# Altium PCB 9981_pro_main_board_PCB.pcbdoc
Units mil, origin at the board's own origin, x right, y up, seen from the top; angles counter-clockwise.
Board outline 4534 x 3830 mil, 2 copper layers (Top Layer, Bottom Layer); 70 components, 80 nets, 321 pads, 260 vias.
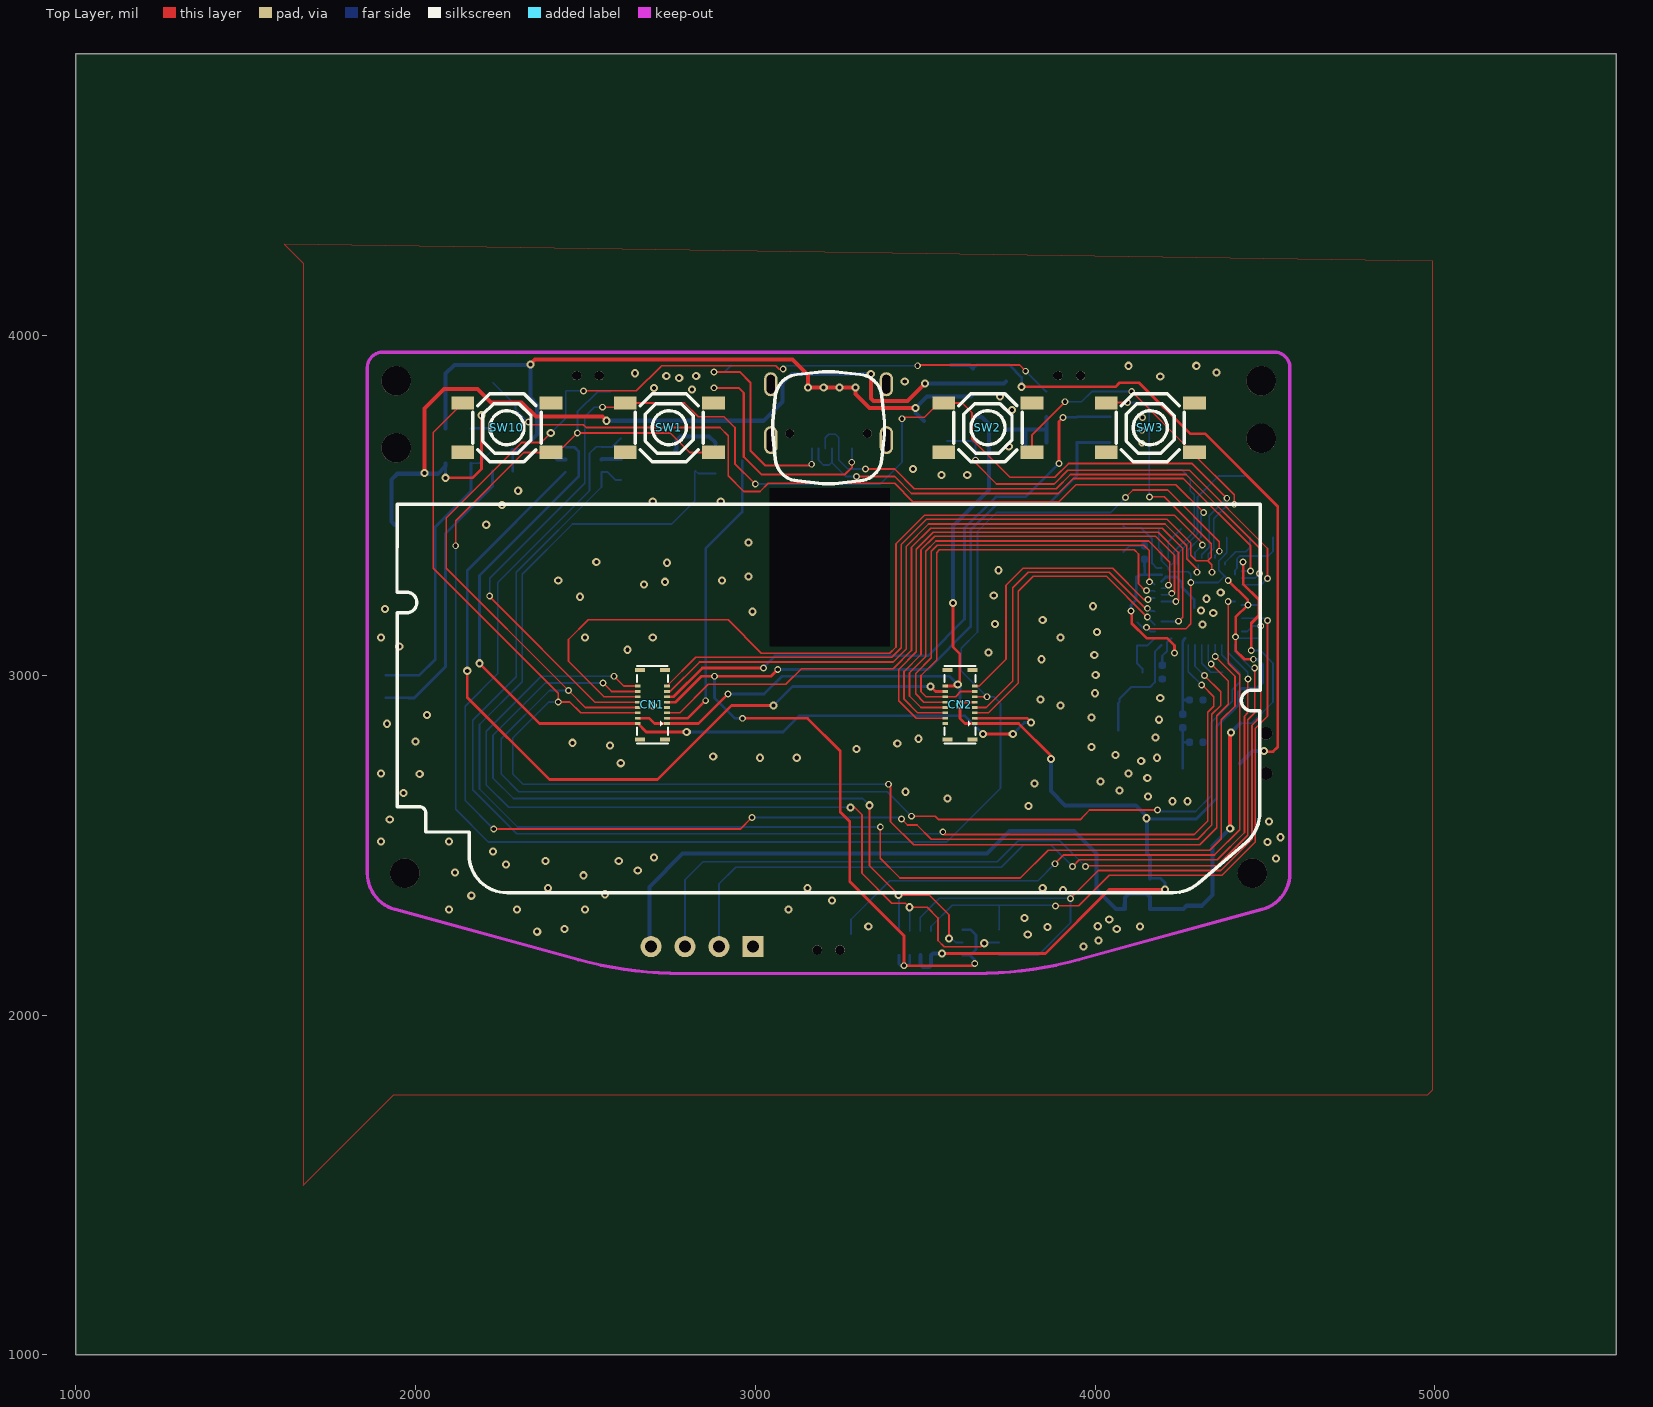
[diagram p0: Top Layer view]
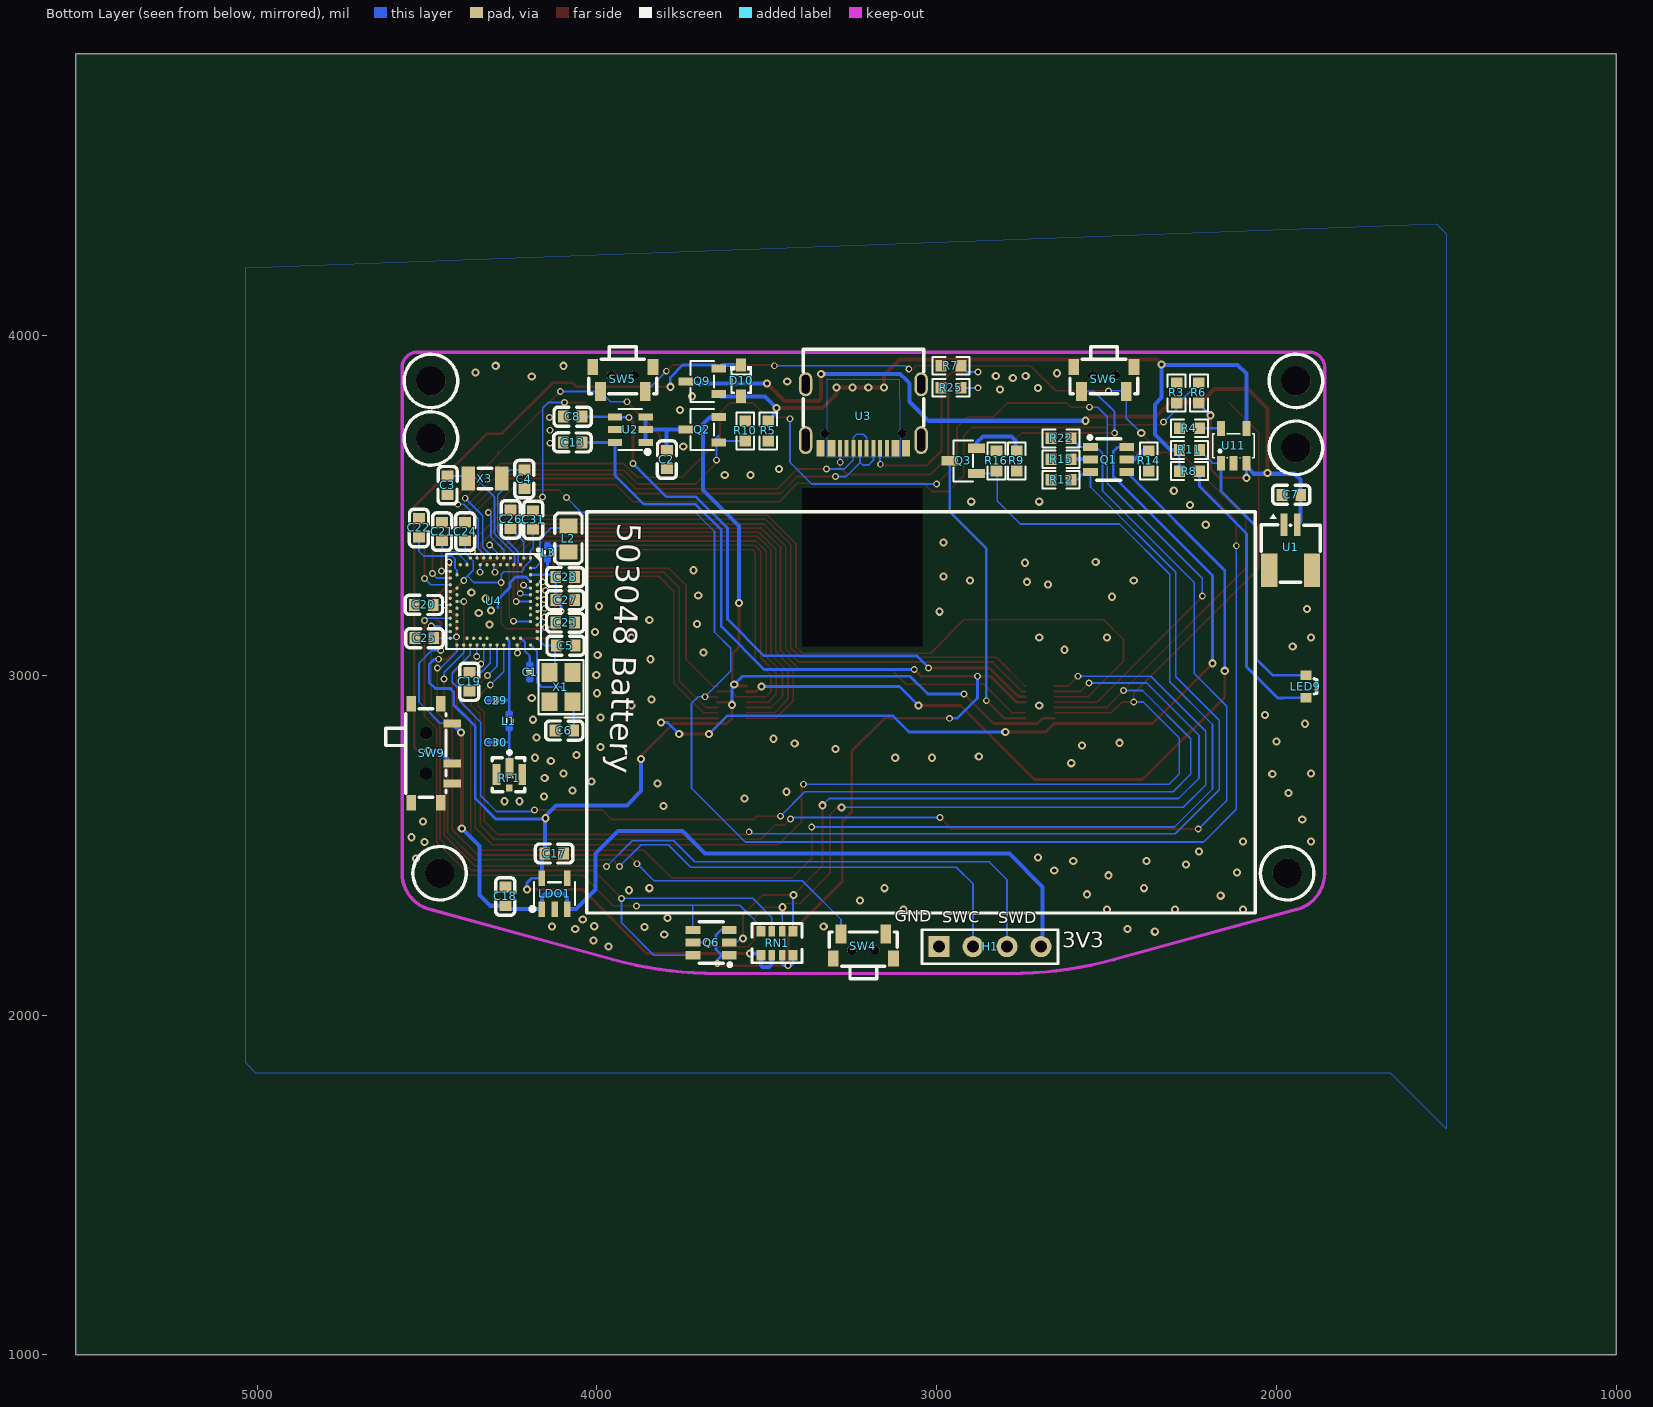
[diagram p1: Bottom Layer view, seen from below]

## Layer stack, top to bottom
Top Layer: signal copper (thickness not stored)
Dielectric: dielectric 12.6, FR-4, Dk 4.8
Bottom Layer: signal copper (thickness not stored)

## Board outline
5534,1000 1000,1000 1000,4830 5534,4830
cut-out: 3042,3552 3042,3086 3396,3086 3396,3552

## Components (designator, comment, footprint, x,y, rotation, side; value= is the part's Value field where it differs from the comment)
C1 "100nF" 0402电容- 4196,3010 r180 bottom
C2 "10uF" C0603 3794,3636 r270 bottom
C3 "20pF" C0603 4440,3560 r90 bottom
C4 "20pF" C0603 4214,3578 r90 bottom
C5 "12pF" C0603 4092,3088 r0 bottom
C6 "12pF" C0603 4096,2838 r0 bottom
C7 "10uF" C0603 1956,3532 r0 bottom
C8 "10uF" C0603 4072,3762 r180 bottom
C13 "10uF" C0603 4072,3686 r0 bottom
C17 "10uF" C0603 4126,2476 r0 bottom
C18 "10uF" C0603 4270,2350 r270 bottom
C19 "820pF" C0603 4376,2982 r270 bottom
C20 "4.7uF" C0603 4510,3208 r180 bottom
C21 "4.7uF" C0603 4456,3424 r270 bottom
C22 "4.7uF" C0603 4524,3434.61 r270 bottom
C23 "100nF" C0603 4094,3156 r180 bottom
C24 "100nF" C0603 4388,3424 r270 bottom
C25 "1uF" C0603 4508,3110 r180 bottom
C26 "100nF" C0603 4254,3460 r270 bottom
C27 "1uF" C0603 4093.39,3222 r0 bottom
C28 "47nF" C0603 4094,3290 r180 bottom
C29 "1pF" 0402电容- 4298,2926 r270 bottom
C30 "1pF" 0402电容- 4298,2802 r270 bottom
C31 "100nF" C0603 4188,3458 r90 bottom
CN1 "BM20B(0.8)-16DS-0.4V(51)" CONN-SMD_BM20B-0.8-16DS-0.4V-51 2697.13,2913.93 r90 top
CN2 "BM20B(0.8)-16DS-0.4V(51)" CONN-SMD_BM20B-0.8-16DS-0.4V-51 3602.64,2913.93 r90 top
D10 "BAT60B" SOD-323_L1.8-W1.3-LS2.5-RD 3576,3868 r90 bottom
H1 "HDR-F-2.54_1x4" HDR-F-2.54_1X4 2843,2202 r0 bottom
L1 "3.9nH" 0402电阻 4260,2866 r0 bottom
L2 "10uH" L0805 4084,3402 r90 bottom
L3 "15nH" 0402电阻 4144,3362 r180 bottom
LDO1 "ME6211C33M5G-N" SOT-23-5_L3.0-W1.7-P0.95-LS2.8-BL 4124.91,2358 r0 bottom
LED9 "TJ-S1706SW6TGLC2R-A5" LED-SMD_L1.7-W1.1-RD_RED-SIDE 1913,2967.75 r90 bottom
Q1 "NDC7002N_C404322" SOT-23-6_L2.9-W1.6-P0.95-LS2.8-BR 2494,3636 r180 bottom
Q2 "AO3401_C727156" SOT-23-3_L2.9-W1.6-P1.90-LS2.8-BR 3690,3724 r0 bottom
Q3 "AO3400A_C347475" SOT-23-3_L2.9-W1.3-P1.90-LS2.4-BR 2922,3632 r0 bottom
Q6 "NDC7002N_C404322" SOT-23-6_L2.9-W1.6-P0.95-LS2.8-BR 3664,2214 r0 bottom
Q9 "AO3401_C727156" SOT-23-3_L2.9-W1.6-P1.90-LS2.8-BR 3690,3866 r0 bottom
R3 "2MΩ" R0603 2294,3832 r90 bottom
R4 "5.1kΩ" R0603 2256,3728 r180 bottom
R5 "10kΩ" R0603 3496,3720 r90 bottom
R6 "820kΩ" R0603 2228,3832 r90 bottom
R7 "5.1kΩ" R0603 2958,3912 r0 bottom
R8 "1kΩ" R0603 2256,3602 r0 bottom
R9 "10Ω" R0603 2764,3632 r90 bottom
R10 "2MΩ" R0603 3564,3720 r270 bottom
R11 "10kΩ" R0603 2256,3664 r0 bottom
R12 "10kΩ" R0603 2634,3576 r180 bottom
R14 "10Ω" R0603 2376,3632 r270 bottom
R15 "10Ω" R0603 2634,3637 r180 bottom
R16 "10kΩ" R0603 2824.02,3632 r270 bottom
R22 "10kΩ" R0603 2634,3698 r0 bottom
R25 "5.1kΩ" R0603 2958,3847 r0 bottom
RF1 "BWIPX-4-001E" IPEX-SMD_BWIPX-4-001E 4258,2698 r180 bottom
RN1 "10kΩ" RES-ARRAY-SMD_0603-8P-L3.2-W1.6-BL 3470,2212 r0 bottom
SW1 "TS-1187A-B-A-B" SW-SMD_4P-L5.1-W5.1-P3.70-LS6.5-TL-2 2746.74,3729.64 r0 top
SW2 "TS-1187A-B-A-B" SW-SMD_4P-L5.1-W5.1-P3.70-LS6.5-TL-2 3684.89,3729.64 r0 top
SW3 "TS-1187A-B-A-B" SW-SMD_4P-L5.1-W5.1-P3.70-LS6.5-TL-2 4162.68,3729.64 r0 top
SW4 "GT-TC018A-H0375-L1" SW-SMD_L4.7-W3.5-P3.35-EH 3215.83,2202.97 r180 bottom
SW5 "GT-TC018A-H0375-L1" SW-SMD_L4.7-W3.5-P3.35-EH 3924.02,3872 r0 bottom
SW6 "GT-TC018A-H0375-L1" SW-SMD_L4.7-W3.5-P3.35-EH 2507.61,3872 r0 bottom
SW9 "MSK12CO2-BDM" SW-SMD_MSK12CO2-BDM 4486.7,2770.9 r90 bottom
SW10 "TS-1187A-B-A-B" SW-SMD_4P-L5.1-W5.1-P3.70-LS6.5-TL-2 2268.94,3729.64 r0 top
U1 "WAFER-SH1.0-2PWB" CONN-SMD_2P-P1.00_XUNPU_WAFER-SH1.0-2PWB 1958,3377 r0 bottom
U2 "VRD1828MTX" SOT-23-6_L2.9-W1.6-P0.95-LS2.8-BL 3902,3724 r270 bottom
U3 "GT-USB-7010ASV" USB-C-SMD_G-SWITCH_GT-USB-7010ASV 3215.83,3763.03 r180 bottom
U4 "NRF52840_dzt" NRF52840_DZT 4304,3222 r90 bottom
U11 "TP4054" SOT-23-5_L3.0-W1.7-P0.95-LS2.8-BR 2126,3676 r90 bottom
X1 "32MHz" CRYSTAL-SMD_4P-L3.2-W2.5-BL 4106,2966 r270 bottom
X3 "32.768kHz" FC-135R_L3.2-W1.5 4330,3579.9 r0 bottom

## Footprints (in the part's own frame and the unit in brackets; to place one, negate y for a bottom-side part, rotate by r counter-clockwise, add the part's x,y. Pads: shape width x height; smd on the part's side, far side on the other; paste and mask are expansions set on the pad)
0402电容- [mil]
  Top Layer region: 8,15 6.53,11.46 3,10 -7,10 -10.54,11.46 -12,15 -12,25 -10.54,28.53 -7,30 3,30 6.53,28.53 8,25
  Top Layer region: 8,-25 6.53,-28.54 3,-30 -7,-30 -10.54,-28.54 -12,-25 -12,-15 -10.54,-11.47 -7,-10 3,-10 6.53,-11.47 8,-15
  silkscreen extent -11,-7 7,7
0402电阻 [mil]
  Top Layer region: -12,-15 -10.53,-11.46 -7,-10 3,-10 6.54,-11.46 8,-15 8,-25 6.54,-28.53 3,-30 -7,-30 -10.53,-28.53 -12,-25
  Top Layer region: -12,25 -10.53,28.54 -7,30 3,30 6.54,28.54 8,25 8,15 6.54,11.47 3,10 -7,10 -10.53,11.47 -12,15
  silkscreen extent -12,-6 8,6
C0603 [mm]
  rect 0.8x0.9 smd paste+0 mask+0.051: 1(0.7,0) 2(-0.7,0)
  silkscreen extent -1.39,-0.72 1.41,0.71
CONN-SMD_2P-P1.00_XUNPU_WAFER-SH1.0-2PWB [mm]
  rect 0.5x1.7 smd paste+0 mask+0.05: 1(0.5,-1.7) 2(-0.5,-1.7)
  rect 1.2x2.5 smd paste+0 mask+0.05: 3(-1.6,1.7) 4(1.6,1.7)
  silkscreen extent -2.2,-2.54 2.2,2.6
CONN-SMD_BM20B-0.8-16DS-0.4V-51 [mm]
  rect 0.2x0.42 smd paste+0 mask+0.051: 1(-1.4,-1.09) 2(-1.4,1.09) 3(-1,-1.09) 4(-1,1.09) 5(-0.6,-1.09) 6(-0.6,1.09) 7(-0.2,-1.09) 8(-0.2,1.09) 9(0.2,-1.09) 10(0.2,1.09) 11(0.6,-1.09) 12(0.6,1.09) 13(1,-1.09) 14(1,1.09) 15(1.4,-1.09) 16(1.4,1.09)
  rect 0.3x0.75 smd paste+0 mask+0.051: 17(2.61,0.925) 18(2.61,-0.925) 19(-2.61,-0.925) 20(-2.61,0.925)
  silkscreen extent -2.91,-1.16 2.9,1.16
CRYSTAL-SMD_4P-L3.2-W2.5-BL [mm]
  rect 1.4x1.2 smd paste+0 mask+0.051: 1(1.1,0.85) 2(-1.1,0.85) 3(-1.1,-0.85) 4(1.1,-0.85)
  silkscreen extent -2.03,-1.68 2.26,1.91
FC-135R_L3.2-W1.5 [mm]
  rect 1x1.8 smd paste+0 mask+0.051: 1(1.25,0) 2(-1.25,0)
  silkscreen extent -0.51,-0.76 0.51,0.76
HDR-F-2.54_1X4 [mil]
  rect 62x62 hole 35 paste+0 mask+2: 1(150,0)
  round 62 hole 35 paste+0 mask+2: 2(50,0) 3(-50,0) 4(-150,0)
  silkscreen extent -200,-50 200,50
IPEX-SMD_BWIPX-4-001E [mm]
  rect 0.6x1.5 smd paste+0 mask+0.051: 1(0,0.738)
  rect 0.58x1.58 smd paste+0 mask+0.051: 2(-0.96,0.263) 3(0.96,0.263)
  rect 0.5x0.5 smd paste+0 mask+0.051: 4(0,-0.737)
  silkscreen extent -1.27,-1.01 1.14,2.05
L0805 [mil]
  rect 44.59x54.21 smd paste-3937.01 mask+2: 1(38.05,0) 2(-38.04,0)
  silkscreen extent -73,-40 77,40
LED-SMD_L1.7-W1.1-RD_RED-SIDE [mm]
  rect 0.7x0.8 smd paste+0 mask+0.051: 1(0.847,0) 2(-0.847,0)
  silkscreen extent -0.56,-0.8 0.57,-0.63
NRF52840_DZT [mm]
  round 0.25 smd paste-100 mask+0.051: A8(1.148,-3.25) A10(0.648,-3.25) A12(0.148,-3.25) A14(-0.352,-3.25) A16(-0.852,-3.25) A18(-1.352,-3.25) A20(-1.852,-3.25) A22(-2.352,-3.25) A23(-2.852,-3.25) AA24(-3.352,2.25) AB2(2.648,2.5) AC5(1.898,2.75) AC9(0.898,2.75) AC11(0.398,2.75) AC13(-0.102,2.75) AC15(-0.602,2.75) AC17(-1.102,2.75) AC19(-1.602,2.75) AC21(-2.102,2.75) AC24(-3.352,2.75) AD2(2.648,3.25) AD4(2.148,3.25) AD6(1.648,3.25) AD8(1.148,3.25) AD10(0.648,3.25) AD12(0.148,3.25) AD14(-0.352,3.25) AD16(-0.852,3.25) AD18(-1.352,3.25) AD20(-1.852,3.25) AD22(-2.352,3.25) AD23(-2.852,3.25) B1(3.148,-2.75) B3(2.398,-2.75) B5(1.898,-2.75) B7(1.398,-2.75) B9(0.898,-2.75) B11(0.398,-2.75) B13(-0.102,-2.75) B15(-0.602,-2.75) B17(-1.102,-2.75) B19(-1.602,-2.75) B24(-3.352,-2.75) C1(3.148,-2.25) D2(2.648,-2) D23(-2.852,-2) E24(-3.352,-1.75) F2(2.648,-1.5) F23(-2.852,-1.5) G1(3.148,-1.25) H2(2.648,-1) H23(-2.852,-1) J1(3.148,-0.75) J24(-3.352,-0.75) K2(2.648,-0.5) L1(3.148,-0.25) L24(-3.352,-0.25) M2(2.648,0) N1(3.148,0.25) N24(-3.352,0.25) P2(2.648,0.5) P23(-2.852,0.5) R1(3.148,0.75) R24(-3.352,0.75) T2(2.648,1) T23(-2.852,1) U1(3.148,1.25) U24(-3.352,1.25) V23(-2.852,1.5) W1(3.148,1.75) W24(-3.352,1.75) Y2(2.648,2) Y23(-2.852,2)
  silkscreen extent -3.65,-3.55 3.85,3.55
R0603 [mil]
  rect 31.75x34.02 smd paste-3937.01 mask+2: 1(29.66,0) 2(-29.66,0)
  silkscreen extent -55,-26 55,26
RES-ARRAY-SMD_0603-8P-L3.2-W1.6-BL [mm]
  rect 0.65x0.8 smd paste+0 mask+0.051: 1(1.2,0.9) 4(-1.2,0.9) 5(-1.2,-0.9) 8(1.2,-0.9)
  rect 0.5x0.8 smd paste+0 mask+0.051: 2(0.4,0.9) 3(-0.4,0.9) 6(-0.4,-0.9) 7(0.4,-0.9)
  silkscreen extent -1.87,-1.47 1.87,1.45
SOD-323_L1.8-W1.3-LS2.5-RD [mm]
  rect 1x0.75 smd paste+0 mask+0.051: 1(1.173,0) 2(-1.173,0)
  silkscreen extent -0.9,-0.8 1.08,0.8
SOT-23-3_L2.9-W1.3-P1.90-LS2.4-BR [mm]
  rect 1.25x0.7 smd paste+0 mask+0.051: 1(-1,0.95) 2(-1,-0.95) 3(1,0)
  silkscreen extent -0.73,-1.53 0.73,1.53
SOT-23-3_L2.9-W1.6-P1.90-LS2.8-BR [mm]
  rect 1.07x0.6 smd paste+0 mask+0.051: 1(-1.235,0.95) 2(-1.235,-0.95) 3(1.235,0)
  silkscreen extent -0.88,-1.54 0.88,1.54
SOT-23-5_L3.0-W1.7-P0.95-LS2.8-BL [mm]
  rect 0.49x1.157 smd paste+0 mask+0.051: 1(0.95,1.154) 2(0,1.154) 3(-0.95,1.154)
  rect 0.49x1.175 smd paste+0 mask+0.051: 4(-0.95,-1.154) 5(0.95,-1.154)
  silkscreen extent -1.53,-0.85 1.8,1.29
SOT-23-5_L3.0-W1.7-P0.95-LS2.8-BR [mm]
  rect 1.1x0.6 smd paste+0 mask+0.051: 1(-1.3,0.95) 2(-1.3,0) 3(-1.3,-0.95) 4(1.3,-0.95) 5(1.3,0.95)
  silkscreen extent -0.9,-1.55 0.9,1.55
SOT-23-6_L2.9-W1.6-P0.95-LS2.8-BL [mm]
  rect 0.532x1.072 smd paste+0 mask+0.051: 1(0.95,1.149) 2(0,1.149) 3(-0.95,1.149) 4(-0.95,-1.149) 5(0,-1.149) 6(0.95,-1.149)
  silkscreen extent -1.54,-0.89 1.82,1.45
SOT-23-6_L2.9-W1.6-P0.95-LS2.8-BR [mm]
  rect 1.1x0.6 smd paste+0 mask+0.051: 1(-1.35,0.95) 2(-1.35,0) 3(-1.35,-0.95) 4(1.35,-0.95) 5(1.35,0) 6(1.35,0.95)
  silkscreen extent -1.52,-1.55 0.9,1.78
SW-SMD_4P-L5.1-W5.1-P3.70-LS6.5-TL-2 [mm]
  rect 1.7x1 smd paste+0 mask+0.051: 1(-3.3,1.85) 2(3.3,1.85) 3(-3.3,-1.85) 4(3.3,-1.85)
  silkscreen extent -2.55,-2.55 2.55,2.55
SW-SMD_L4.7-W3.5-P3.35-EH [mm]
  rect 0.8x1.4 smd paste+0 mask+0.051: 1(1.675,0.918) 2(-1.675,0.918)
  rect 0.8x1.2 smd paste+0 mask+0.051: 3(2.25,-0.917) 4(-2.25,-0.917)
  round 0.7 hole 0.7 unplated paste+0: ""(-0.85,-0.282) ""(0.85,-0.282)
  silkscreen extent -2.54,-2.43 2.54,1.07
SW-SMD_MSK12CO2-BDM [mm]
  rect 0.6x1.3 smd paste+0 mask+0.051: 1(-2.25,-1.525) 2(-0.75,-1.525) 3(2.25,-1.525)
  rect 1.15x0.7 smd paste+0 mask+0.051: 4(-3.7,1.525) 4(-3.7,-0.675) 4(3.7,-0.675) 4(3.7,1.525)
  round 0.95 hole 0.95 unplated paste+0: ""(-1.5,0.425) ""(1.5,0.425)
  silkscreen extent -3.27,-1.08 3.33,3.42
USB-C-SMD_G-SWITCH_GT-USB-7010ASV [mm]
  oval 1x2.1 hole 0.6 slot 1.7 at 90 deg paste+0 mask+0.05: 1(4.32,-1.78) 2(-4.32,-1.78)
  oval 1x1.8 hole 0.6 slot 1.4 at 90 deg paste+0 mask+0.05: 3(-4.32,2.4) 4(4.32,2.4)
  rect 0.6x1.24 smd paste-100 mask+0.05: A1B12(3.2,-2.4) A4B9(2.4,-2.4) B1A12(-3.2,-2.4) B4A9(-2.4,-2.4)
  rect 0.3x1.24 smd paste-100 mask+0.05: A5(1.25,-2.4) A6(0.25,-2.4) A7(-0.25,-2.4) A8(-1.25,-2.4) B5(-1.75,-2.4) B6(-0.75,-2.4) B7(0.75,-2.4) B8(1.75,-2.4)
  round 0.65 hole 0.65 unplated paste+0: ""(-2.89,-1.28) ""(2.9,-1.28)
  silkscreen extent -4.5,-0.69 4.5,5.03

## Free pads (board coordinates)
  round 86.61 hole 86.61 unplated paste+0: ""(1942.65,3670.5) ""(1942.65,3867.35) ""(1968.24,2417.99) ""(4463.39,2417.98) ""(4488.98,3698.06) ""(4488.98,3867.35)

## Via types
v1: diameter 24, hole 12, Top Layer to Bottom Layer, tented both sides, 165 vias
v2: diameter 20, hole 12, Top Layer to Bottom Layer, tented both sides, 92 vias
v3: diameter 24.41, hole 12.2, Top Layer to Bottom Layer, tented both sides, 3 vias

## Nets (pads, with @x,y where several pads share a name; then routed paths per layer and width w, separated by ;. In a path a pad name is that pad's centre, name@x,y a point inside that pad or via, vN(x,y) a via of type N, cw(c..) or ccw(c..) an arc to the next point about the centre after c; other vN are vias at no path point)
1V8: C13.2 CN1.9 Q6.1 Q6.3 RN1.3 RN1.4 U2.6 | length 3817.9
  Top Layer w8: CN1.9 2765.8,2921.8 2842,2998 v2(2880,2998) 3046,2998 v2(3066,3018) ; v2(2962,2874) 3154,2874 3250,2778 3250,2598 3278,2570 3278,2394 3438,2234 ; 3286,2386 3438,2234 ; v2(3646,2152) 3640,2146 v2(3438,2146) ; v2(3438,2146) 3438,2234 ; v2(3438,2146) 3438,2234
  Bottom Layer w8: v2(2880,2998) 2880,2934 2940,2874 v2(2962,2874) ; v2(3066,3018) 3508,3018 3634,3144 3634,3428 3710,3504 3862,3504 3947.24,3589.24 U2.6 ; RN1.4 3422.8,2151.2 3428,2146 v2(3438,2146) 3450,2146 3454.3,2150.2 RN1.3 ; Q6.1@3610.9,2176.6 3632.6,2176.6 ; Q6.3@3610.9,2251.4 3634.6,2251.4 3650,2236 3650,2194 3632.6,2176.6 ; v2(3646,2152) 3646,2163.2 3632.6,2176.6 ; U2.6 3947.8,3686 C13.2
2V8: C8.1 CN1.11 U2.4 | length 1876.5
  Top Layer w8: CN1.11 2759.6,2937.6 2844,3022 v2(3024,3022) ; v2(3894,3624) 3894,3748 v2(3906,3760)
  Bottom Layer w8: v2(3024,3022) 3024,3024 3058,3058 3508,3058 3616,3166 3616,3434 3708,3526 3796,3526 v2(3894,3624) ; v2(3906,3760) 3945.84,3760 U2.4 ; U2.4 C8.1
AI2: R3.2 R6.1 U4.J1 | length 2544.2
  Top Layer w5: v2(2332,3746) 2340,3738 2494,3738 2502,3730 2896,3730 2920,3706 2920,3588 2966,3542 3014,3542 3038,3566 3410,3566 3464,3512 3894,3512 3944,3562 4238,3562 v2(4320,3480)
  Bottom Layer w5: R6.1 2287.32,3802.34 R3.2 2294,3784 v2(2332,3746) ; U4.J1 4274.47,3370.47 4312,3408 4312,3472 v2(4320,3480)
AI3: U4.K2
CN2_2: CN2.2
COL0: CN1.10 SW1.1 SW2.1 U4.N1 | length 4457.9
  Top Layer w5: v2(2218,3234) 2218,3232 2528.19,2921.81 CN1.10 ; v2(2550,3790) 2604.3,3790 SW1.1 2791.52,3802.48 2832,3762 2908,3762 2940,3730 2940,3624 v2(3000,3564) ; v2(3432,3756) 3436,3760 3498,3760 3540.5,3802.5 SW2.1 ; SW2.1 3609.52,3802.48 3638,3774 3638,3696 3750,3584 3882,3584 3922,3624 4286,3624 v2(4388,3522)
  Bottom Layer w5: v2(2218,3234) 2218,3274 ; v2(2550,3790) 2526,3790 2498,3762 ; v2(3000,3564) 3368,3564 3432,3628 v2(3432,3756) ; U4.N1 4313.84,3355.84 4336,3378 4336,3470 v2(4388,3522) ; 2218,3274 2218,3286 ; 2218,3274 2218,3286 ; 2218,3286 2498,3566 ; 2218,3286 2498,3566 ; 2498,3566 2498,3762 ; 2498,3566 2498,3762
COL1: CN1.8 SW5.2 SW6.2 U4.W24 | length 6599.5
  Top Layer w5: 2090,3444 2090,3316 ; v3(2398,3714) 2370,3686 2312,3686 2090,3464 2090,3316 ; v2(2494,3838) 2650,3838 2720,3908 2724,3912 3060,3912 3070,3902 v2(3082,3902) ; CN1.8 2499.9,2906.1 v2(2450,2956) ; v2(3460,2586) 3530,2586 3540,2576 3956.24,2576 3984,2604 v2(4184,2604) ; v2(3478,3912) 3480,3914 3778,3914 v2(3796,3896) ; 2090,3316 v2(2450,2956) ; 2090,3316 v2(2450,2956)
  Bottom Layer w5: v3(2398,3714) 2441.66,3757.66 SW6.2 ; SW6.2 2443.8,3838 v2(2494,3838) ; v2(2450,2956) 2394,2956 2252,2814 2252,2710 2304,2658 3388,2658 v2(3460,2586) ; v2(3082,3902) 3092,3912 v2(3478,3912) ; v2(3796,3896) 3856.1,3835.9 SW5.2 ; v2(4184,2604) 4188,2600 4296,2600 4342,2646 4342,2650 4342,2862 4404,2924 4404,2958 4414,2968 4426,2980 4426,3008 4372.9,3061.1 U4.W24@4372.9,3090.05
COL2: CN1.6 SW10.1 U4.R24 | length 4555.1
  Top Layer w5: SW10.1 2052,3715.5 2052,3316 2420,2948 v2(2420,2922) 2454,2922 2485.69,2890.31 CN1.6 ; v2(3392,2680) 3398,2674 3398,2570 3466,2502 4308,2502 4358,2552 4358,2882 4392,2916 ; 4392,2916 4392,2984 ; 4392,2916 4392,2984 ; 4392,2984 v2(4342,3034) 4392,2984
  Bottom Layer w5: v2(2420,2922) 2392,2922 2286,2816 2286,2710 2316,2680 v2(3392,2680) ; U4.R24@4333.53,3090.05 4333.53,3042.47 v2(4342,3034)
COL3: CN1.15 SW3.1 U4.T2 | length 2796.3
  Top Layer w5: CN1.15@2740,2969.1 2824.9,3054 3402,3054 3430,3082 3430,3386 3504,3460 4212,3460 4282,3390 4282,3354 4298,3338 4332,3338 ; SW3.1 4034.3,3804 v2(4096,3804) ; v2(4160,3526) 4204,3526 4342,3388 4342,3348 4332,3338 ; v2(4344,3304) 4344,3326 4332,3338
  Bottom Layer w5: v2(4096,3804) 4144,3804 4160,3788 v2(4160,3526) ; U4.T2 4344,3325.64 v2(4344,3304)
COL4: CN1.5 U4.B19 | length 2215.8
  Top Layer w5: CN1.5 2778.3,2890.3 2862,2974 3090,2974 3136,3020 3406,3020 3460,3074 3460,3378 3516,3434 4198,3434 4258,3374 4258,3172 v2(4246,3160)
  Bottom Layer w5: U4.B19 4244.94,3158.94 v2(4246,3160)
COL5: CN2.12 CN2.13 U4.A10 | length 1346.7
  Top Layer w5: CN2.13@3645.5,2953.3 3605.3,2953.3 3589.6,2937.6 CN2.12 3502.4,2937.6 3488,2952 3488,3000 3534,3046 3534,3362 3542,3370 4116,3370 4128,3358 4128,3270 4148,3250 v2(4152,3250)
  Bottom Layer w5: v2(4152,3250) 4173.58,3250 U4.A10@4176.05,3247.53
COL6: CN2.10 U4.A8 | length 1304.6
  Top Layer w5: CN2.10 3496.2,2921.8 3472,2946 3472,3006 3518,3052 3518,3366 3536,3384 4144,3384 4160,3368 v2(4160,3276)
  Bottom Layer w5: v2(4160,3276) 4167.26,3276 U4.A8@4176.05,3267.21
COL7: CN2.8 U4.B9 | length 1417.6
  Top Layer w5: CN2.8 3487.9,2906.1 3454,2940 3454,3008 3502,3056 3502,3366 3532,3396 4158,3396 4220,3334 4220,3266 v2(4216,3266)
  Bottom Layer w5: U4.B9 4207.37,3257.37 v2(4216,3266)
COL8: CN2.6 U4.B11 | length 1536.7
  Top Layer w5: CN2.6 3477.7,2890.3 3438,2930 3438,3012 3488,3062 3488,3370 3528,3410 4178,3410 4234,3354 4234,3242 v2(4226,3242)
  Bottom Layer w5: U4.B11 4221.68,3237.68 v2(4226,3242)
COL9: CN2.4 U4.B13 | length 1638.4
  Top Layer w5: CN2.4 3473.4,2874.6 3422,2926 3422,3018 3474,3070 3474,3372 3524,3422 4186,3422 4246,3362 4246,3220 4238,3220 v2(4238,3218)
  Bottom Layer w5: U4.B13 v2(4238,3218)
DCC: L2.1 U4.B3 | length 205.1
  Bottom Layer w6: L2.1 4090,3434 4136,3434 4168,3402 4168,3330 4181.6,3316.4 U4.B3
DCCH: U4.AB2
DEC2: U4.A18
DEC6: C27.1 C28.2 U4.B5 U4.E24 | length 461
  Top Layer w8: v2(4106,3190) 4108,3188 4108,3154 4152,3110 4212,3110 4234,3088 v2(4234,3066)
  Bottom Layer w6: v2(4234,3066) 4234,3089 U4.E24
  Bottom Layer w8: v2(4106,3190) 4106,3207.1 C27.1 C28.2 ; C28.2@4125.6,3290 4132.3,3296.7 U4.B5 ; 4146,3342 4146.3,3296.7
DECUSB: C22.1 U4.AC5 | length 205.8
  Bottom Layer w5: U4.AC5 4412.27,3310.27 4418,3316 4418,3344 4426,3352 4510,3352 4524,3366 C22.1
EXT_VCC: C2.2 Q2.3 U2.1 U2.2 U2.3 | length 254.1
  Bottom Layer w12: Q2.3 U2.2 ; C2.2 3795.6,3665.2 3795.6,3724 ; U2.1 U2.3
EXTERN_5V: D10.2 Q9.1 R5.1 R8.1 R11.1 U3.A4B9 U3.B4A9 U11.4 | length 2255.7
  Top Layer w12: v1(2338,3916) 2352,3930 3110,3930 3154.7,3885.3 v1(3154.67,3848) ; v1(3154.67,3848) v1(3294.67,3848) 3294.67,3829.33 3336,3788 v1(3472,3788)
  Bottom Layer w8: R8.1 R11.1
  Bottom Layer w12: U11.4 2088.6,3888.6 2114,3914 2336,3914 v1(2338,3916) 2338,3818 2358,3798 2358,3710 2312,3664 R11.1 ; R5.1 3472,3773.7 v1(3472,3788) 3505.8,3821.8 D10.2 3634.6,3821.8 Q9.1
  other v1: 3201.34,3848 3248,3848
GND: C2.1 C3.2 C4.2 C5.2 C6.1 C7.1 C8.2 C13.1 C17.2 C18.2 C19.1 C20.2 C21.2 C22.2 C23.1 C24.2 C25.2 C26.2 C27.2 C28.1 C31.1 CN1.7 CN1.17 CN1.18 CN1.19 CN1.20 CN2.17 CN2.18 CN2.19 CN2.20 H1.1 LDO1.2 R3.1 R4.2 R5.2 R7.1 R9.2 R10.2 R12.2 R14.1 R15.2 R16.2 R22.1 R25.1 RF1.2 RF1.3 RF1.4 SW4.1 U1.1 U1.3 U1.4 U2.5 U3.1 U3.2 U3.3 U3.4 U3.A1B12 U3.B1A12 U4.B7 U4.F23 U11.2 X1.2 X1.4 | length 161.2
  Bottom Layer w8: U4.B7 4208.68,3290 4240,3290 4256,3274 4256,3260 4292,3224 4292,3200
  other v1: 3966,2202 4010,2220 3802,2238 2358,2246 2438,2254 4064,2254 3860,2260 3332.7,2261.08 4132.7,2261.08 4008,2262 4042,2282 3792,2286 2098.2,2311.8 2298.2,2311.8 2498.2,2311.8 3098.2,2311.8 3226,2338 2164,2352 2558,2356 3906,2368 2390,2374 3154,2374 3846,2374 2494,2412 2116,2420 2654,2426 2266,2444 2382,2454 2598,2454 4532.7,2461.08 2702,2464 2228,2482 4508,2510 1898.2,2511.8 2098.2,2511.8 4546,2524 4512,2570 1924,2576 3804,2616 4228,2630 4272,2630 3566,2638 4156,2644 1964,2654 3442,2658 4072,2662 3822,2682 4016,2688 4154,2698 2012,2710 1898.2,2711.8 4098.2,2711.8 2604,2742 4136,2748 3014,2758 3122,2758 4182,2758 2876,2762 4060,2766 3298,2784 3990,2790 2572,2794 3418,2800 2462,2802 2000,2806 3480,2814 4178,2818 1916,2858 4188,2870 3990,2876 2034,2884 2698.2,2911.8 3898.2,2911.8 3840,2930 4192,2934 4000,2948 4002,3002 3842,3048 3998,3060 3686,3068 2624,3076 1952,3086 1898.2,3111.8 2498.2,3111.8 2698.2,3111.8 3898.2,3111.8 4006,3128 4316,3150 3706,3152 3846,3164 4348,3184 2992,3188 4312,3192 1910,3196 3994,3204 4328,3226 2484,3232 3702,3236 4370,3244 2672,3268 2734,3276 2420,3280 2902,3280 2980,3292 3716,3310 2740,3332 2532,3334 2980,3392 2208,3444 2254,3502 2698.2,3511.8 2898.2,3511.8 2302,3544 3548,3590 3624,3590 3464,3608 3746.11,3673.99 3756,3782 3720,3822 2814,3842 2702,3846 3440,3866 2776,3876 4192,3880 2738,3882 2826,3882 2646,3890 4358,3892 4098.2,3911.8 4298.2,3911.8
  other v2: 4138,3684 4138,3722 4140,3760
KEYB2: CN2.11 SW1.4 SW6.1 SW10.4 U4.U1 | length 5384
  Top Layer w5: v2(2118,3382) 2118,3456 2318.8,3656.8 SW10.4 ; SW10.4 2418.8,3656.8 v2(2476,3714) 2750,3714 2807.2,3656.8 SW1.4 ; CN2.11@3645.5,2937.6 v2(3682,2937.56) ; v2(4090,3524) 4112,3546 4214,3546 4366,3394 v2(4366,3366)
  Bottom Layer w5: v2(2118,3382) 2118,2606 2214,2510 3564,2510 3722,2668 3722,2918 3702.4,2937.6 v2(3682,2937.56) 3606,3013.6 3606,3080 3654,3128 3654,3424 3710,3480 4046,3480 v2(4090,3524) ; U4.U1 4353.21,3353.21 v2(4366,3366)
  Bottom Layer w6: v2(2476,3714) 2476,3776 2535.9,3835.9 SW6.1@2573.5,3835.9
L1_1: RF1.1 | length 139
  Bottom Layer w7.99: RF1.1 4258,2846 ; 4258,2804 4278,2804
L3_1: L2.2 | length 69.5
  Bottom Layer w6: L2.2 4102,3382 4128,3382 4146,3382
LEDA_D: CN1.2 CN2.3 Q1.6 | length 2725.4
  Top Layer w8: v1(2188,3036) 2365.2,2858.8 CN1.2 2679.04,2834 v1(2798,2834) ; CN2.3@3645.5,2874.6 3799.4,2874.6 v1(3812,2862) ; v1(3670,2828) v1(3758,2828)
  Bottom Layer w8: v1(2188,3036) 2188,3294 2480,3586 2480,3660 2468,3672 2442.3,3672 Q1.6 ; v1(2798,2834) 3082,2834 3130,2882 3616,2882 v1(3670,2828) ; v1(3758,2828) 3792,2862 v1(3812,2862)
LEDB_+: C17.1 C20.1 C23.2 C24.1 C25.1 C31.2 CN1.1 CN1.4 CN2.1 CN2.9 CN2.16 LDO1.5 Q2.2 RN1.1 RN1.2 U4.A22 U4.AD14 U4.AD23 U4.B1 U4.W1 | length 5898
  Top Layer w5: v2(4152,3142) 4156,3138 4268,3138 4282,3152 v2(4282,3274)
  Top Layer w8: CN1.4 2687.4,2874.6 2703.2,2858.8 CN1.1 ; CN1.1 2832.82,2858.82 v2(2920,2946) ; v1(3550,2182) 3854,2182 4042,2370 v1(4206,2370) ; CN2.16@3559.7,2969.1 3591.1,2969.1 v1(3596,2974) 3602,2980 3602,3064 3582,3084 v1(3582,3214) ; CN2.9@3645.5,2921.8 3610.5,2921.8 v1(3602.64,2913.93) 3602.6,2873.4 3617.2,2858.8 3645.5,2858.8 3775.2,2858.8 3870,2764 v1(3870,2754) ; v2(4392,3280) 4450,3222 v2(4450,3208) 4414,3172 v2(4414,3114) 4414,3074 4440,3048 v2(4466,3048)
  Bottom Layer w5: C31.2 4188,3375.46 4195.73,3367.73 U4.B1 4195.73,3338.27 4215.86,3318.14 4215.86,3312.14 4222,3306 4274,3306 4282,3298 v2(4282,3274) 4362.32,3274 4381.16,3292.84 ; C24.1@4388,3407.05 4388,3361.05 U4.W1 4364,3337.05 4364,3310 4392,3282 v2(4392,3280) ; v2(4414,3114) 4418,3110 C25.1
  Bottom Layer w6: C23.2@4125.6,3156 4139.6,3142 v2(4152,3142) 4164.58,3129.42 U4.A22@4176.05,3129.42 ; U4.AD14 4432.2,3208 v2(4450,3208) C20.1
  Bottom Layer w8: v2(2920,2946) 3026,2946 3078,2998 3572,2998 v1(3596,2974) 3602.64,2967.36 v1(3602.64,2913.93) ; v1(4152,2580) 4154,2578 4298,2578 4358,2638 4358,2850 4422,2914 4422,2952 4432,2962 4476,2962 4494,2980 4494,3032 4478,3048 v2(4466,3048) ; LDO1.5 4192.6,2403.4 4206,2390 v1(4206,2370)
  Bottom Layer w12: RN1.2@3485.7,2176.6 3485.7,2150.2 3494,2142 3512,2142 3517.2,2147.2 RN1.1 3522.7,2182 v1(3550,2182) ; v1(3582,3214) 3582,3440 3688,3546 3688,3644 3688,3740 3666.6,3761.4 Q2.2 ; v1(3870,2754) 3870,2660 3912,2618 4120,2618 4153.6,2584.4 C17.1 4162.3,2467.2 LDO1.5
LEDB_D: CN1.3 Q3.3 | length 885.8
  Top Layer w8: CN1.3 2801.4,2874.6 2852.8,2926 v2(2854,2926)
  Bottom Layer w8: v2(2854,2926) 2854,3374 2961.37,3481.37 Q3.3
P0.09: Q1.1 R22.2 U4.L24 | length 5336
  Top Layer w5: v2(2230,2548) 2956,2548 v2(2990,2582) ; v2(3430,2578) 3448,2560 3476,2560 3518,2518 4302,2518 4344,2560 4344,2886 4370,2912 4370,2952 v2(4322,3000)
  Bottom Layer w5: 2146,2660 2146,2910 ; v2(2230,2548) 2146,2632 2146,2910 ; v2(2990,2582) 3426,2582 v2(3430,2578) ; U4.L24@4294.16,3090.05 4294.16,3027.84 v2(4322,3000) ; 2146,2910 2242,3006 ; 2146,2910 2242,3006 ; 2242,3006 2242,3274 ; 2242,3006 2242,3274 ; 2242,3274 2512,3544 ; 2242,3274 2512,3544 ; 2512,3544 2512,3654 ; 2512,3544 2512,3654 ; 2512,3654 Q1.1@2531.4,3673.4 ; 2512,3654 Q1.1@2531.4,3673.4 ; Q1.1@2531.4,3673.4 Q1.1 Q1.1@2531.4,3673.4
  Bottom Layer w6: Q1.1@2547.1,3673.4 2579.7,3673.4 R22.2
P0.10: Q1.3 R12.1 U4.J24 | length 3961.1
  Top Layer w5: v2(3552,2540) 3552,2532 4292,2532 4332,2572 4332,2892 4350,2910 4350,2938 4316,2972 v2(4314,2972)
  Bottom Layer w5: Q1.3 2547.2,3555.2 2296,3304 2296,2996 2168,2868 2168,2664 2298,2534 3546,2534 v2(3552,2540) ; U4.J24@4274.47,3090.05 4274.47,3011.53 v2(4314,2972)
  Bottom Layer w6: Q1.3@2547.1,3598.6 2565.4,3598.6 2588,3576 R12.1
P0.13: Q2.1 R10.1 U4.AD8 | length 1353.2
  Top Layer w5: v2(3648,3634) 3648,3626 3710,3564 3880,3564 3920,3604 4278,3604 4508,3374 v2(4508,3286)
  Bottom Layer w5: Q2.1 3641.4,3707.4 3648,3700.8 v2(3648,3634) ; U4.AD8 4489.21,3267.21 v2(4508,3286)
  Bottom Layer w6: R10.1 3637.6,3690.3 Q2.1
P0.15: U4.AD10
P0.17: U4.AD12
P0.20: U4.AD16
P0.22: Q6.4 RN1.8 U4.AD18 | length 1892.1
  Top Layer w5: v2(3884,2322) 3952,2322 4042,2412 4374,2412 4472,2510 4472,2844 4508,2880 v2(4508,3162)
  Bottom Layer w5: RN1.8 3517.2,2261.2 3580,2324 3882,2324 v2(3884,2322) ; Q6.4 3718.3,2252.6 3718.3,2324 ; U4.AD18 4501.21,3168.79 v2(4508,3162)
P0.24: U4.AD20
P0.26: U4.G1
P1.00: Q6.6 RN1.7 U4.AD22 | length 2136
  Top Layer w5: v2(3928,2344) 4010,2426 4370,2426 4462,2518 4462,2854 4488,2880 v2(4488,3146)
  Bottom Layer w5: RN1.7 3485.7,2287.7 3542,2344 v2(3928,2344) 3928,2272 3832.6,2176.6 Q6.6 ; U4.AD22 4447.42,3129.42 4464,3146 v2(4488,3146)
P1.04: Q3.1 R16.1 U4.U24 | length 4438
  Top Layer w5: v2(3368,2554) 3368,2462 3426,2404 3780,2404 3862,2486 4338,2486 4372,2520 4372,2870 4412,2910 4412,2998 v2(4354,3056)
  Bottom Layer w5: Q3.1 2831.8,3594.6 R16.1 2822,3600.3 2822,3514 2754,3446 2462,3446 2314,3298 2314,2982 2188,2856 2188,2666 2300,2554 v2(3368,2554) ; U4.U24@4353.21,3090.05 4354,3089.26 v2(4354,3056)
P1.09: SW2.4 SW3.4 SW5.1 U4.R1 | length 1058.3
  Top Layer w5: SW2.4 3814.8,3708.8 v2(3912,3806) ; v2(4108,3836) 4287.2,3656.8 SW3.4 4292.6,3649.4 4410,3532 v2(4410,3504)
  Bottom Layer w5: v2(3912,3806) 3960.08,3806 SW5.1 ; SW5.1 v2(4108,3836) ; U4.R1 4333.5,3357.5 4350,3374 4350,3462 4392,3504 v2(4410,3504)
R4_1: R4.1 U11.5 | length 62.9
  Bottom Layer w8: U11.5 R4.1
R7_2: R7.2 U3.A5 | length 625.6
  Top Layer w6: v2(2878,3894) 2954,3894 2986,3862 2986,3662 3030,3618 3162,3618 v2(3166,3622)
  Bottom Layer w6: v2(2878,3894) 2910.3,3894 R7.2 ; v2(3166,3622) 3166.6,3622.6 U3.A5
R8_2: LED9.2 R8.2 | length 846.5
  Bottom Layer w8: LED9.2 1979.6,2934.4 1980,2934 1996,2934 2088,3026 2088,3418 2226.3,3556.4 R8.2
R9_1: Q3.2 R9.1 | length 175.2
  Bottom Layer w12: R9.1 2768,3665.7 2768,3692 2780,3704 2864,3704 2882.6,3685.4 Q3.2
R11_2: LED9.1 R11.2 U11.1 | length 864.1
  Bottom Layer w5: U11.1 2187.15,3624.81 R11.2
  Bottom Layer w8: LED9.1 2011.08,3001.08 2058,3048 2058,3438 2163.4,3543.4 U11.1
R14_2: Q1.5 R14.2 | length 75.4
  Bottom Layer w12: R14.2 2392.3,3661.7 2418,3636 Q1.5
R15_1: Q1.2 R15.1 | length 57.6
  Bottom Layer w12: Q1.2@2547.1,3636 2548.1,3637 R15.1
R25_2: R25.2 U3.B5 | length 736.8
  Top Layer w6: v2(2878,3847) 2951,3847 2966,3832 2966,3644 3018,3592 3264,3592 3284,3612 v2(3284,3628)
  Bottom Layer w6: v2(2878,3847) R25.2 ; v2(3284,3628) U3.B5
RESET: SW4.2 U4.AC13 | length 2002.7
  Top Layer w5: v2(3882,2446) 3908,2472 4352,2472 4426,2546 4426,3002 4392,3036 v2(4392,3218)
  Bottom Layer w5: SW4.2 3281.8,2281.8 3396,2396 3832,2396 v2(3882,2446) ; v2(4392,3218) U4.AC13
ROW0: CN2.5 U4.A20 | length 914.8
  Top Layer w5: CN2.5@3645.5,2890.3 3686.3,2890.3 3774,2978 3774,3248 3818,3292 4034,3292 v2(4154,3172)
  Bottom Layer w5: v2(4154,3172) 4154,3171.15 U4.A20@4176.05,3149.1
ROW1: CN1.12 U4.L1 | length 2675.4
  Top Layer w5: CN1.12 2554.4,2937.6 2450,3042 2450,3106 2508,3164 2920,3164 3018,3066 3396,3066 3414,3084 3414,3388 3498,3472 4234,3472 4316,3390 v2(4316,3384)
  Bottom Layer w5: U4.L1 4294.16,3362.16 v2(4316,3384)
ROW2: CN1.13 U4.M2 | length 2051.9
  Top Layer w5: CN1.13 2749.3,2953.3 2836,3040 3406,3040 3444,3078 3444,3380 3510,3446 4206,3446 4270,3382 4270,3344 4300,3314 v2(4300,3304)
  Bottom Layer w5: v2(4300,3304) 4304,3308 U4.M2
ROW3: CN2.7 U4.A16 | length 903.7
  Top Layer w5: CN2.7@3645.5,2906.1 3680.1,2906.1 3758,2984 3758,3258 3804,3304 4042,3304 4148,3198 v2(4154,3198)
  Bottom Layer w5: v2(4154,3198) 4156,3198 4164,3190 4174.52,3190 U4.A16@4176.05,3188.47
S$8205: 
S$8209: 
S$8213: 
S$8217: 
S$48758: 
S$52734: 
SWC: H1.2 U4.AA24 | length 2427.5
  Top Layer w5: v2(3934,2438) 3954,2458 4360,2458 4440,2538 4440,2880 4450,2890 v2(4450,2990)
  Bottom Layer w5: H1.2 2893,2387 2942,2436 3724,2436 3790,2502 3870,2502 v2(3934,2438) ; U4.AA24@4392.58,3090.05 4392.58,3067.42 4450,3010 v2(4450,2990)
SWD: H1.3 U4.AC24 | length 2579.5
  Top Layer w5: v2(3972,2438) 3974,2440 4360,2440 4450,2530 4450,2870 4470,2890 v2(4470,3022)
  Bottom Layer w5: H1.3 2793,2399 2846,2452 3712,2452 3774,2514 3896,2514 v2(3972,2438) ; U4.AC24 4412.27,3069.73 4468,3014 4468,3020 v2(4470,3022)
TP_MOTION2_1V8: CN2.15 U4.A12 | length 842.9
  Top Layer w5: CN2.15@3645.5,2969.1 3659,2969.1 3738,3048 3738,3266 3788,3316 4052,3316 4144,3224 v2(4156,3224)
  Bottom Layer w5: v2(4156,3224) 4156,3226 4158,3228 4175.89,3228 U4.A12@4176.05,3227.84
TP_SCL_1V8: CN1.16 Q6.5 RN1.6 | length 2604.7
  Top Layer w5: v2(2584,2998) 2613,2969.1 CN1.16@2654.2,2969.1 ; v1(3280,2612) 3292.01,2612 3314,2590.01 3314,2418 3402,2330 3442,2330 v1(3454,2318) 3506,2318 3538,2286 3538,2220 3556,2202 3664,2202 v1(3674,2212)
  Bottom Layer w5: v2(2584,2998) 2370,2998 2208,2836 2208,2678 2274,2612 v1(3280,2612) ; v1(3454,2318) 3454.3,2317.7 RN1.6@3454.3,2247.4 ; v1(3674,2212) 3676,2214 Q6.5
TP_SDA_1V8: CN1.14 Q6.2 RN1.5 | length 2461.8
  Top Layer w5: v2(2552,2978) 2576.7,2953.3 CN1.14 ; v1(3336,2618) 3336,2440 v1(3422,2354) 3512,2354 3570,2296 v1(3570,2226)
  Bottom Layer w5: v2(2552,2978) 2382,2978 2228,2824 2228,2698 2288,2638 3316,2638 v1(3336,2618) ; v1(3422,2354) 3422.8,2353.2 RN1.5 ; v1(3570,2226) 3578,2226 3590,2214 Q6.2@3610.9,2214
TPBLK_LEDK2: CN2.14 Q1.4 | length 2409.7
  Top Layer w8: v1(2152,3014) 2152,2936 2394,2694 2712,2694 2930,2912 v1(3054,2912) ; v1(3516,2968) 3530.7,2953.3 CN2.14
  Bottom Layer w8: v1(2152,3014) 2152,3309.8 Q1.4 ; v1(3054,2912) 3110,2968 v1(3516,2968)
U4_C1: C26.1 U4.C1 | length 102.5
  Bottom Layer w5: U4.C1 4215.42,3393.86 C26.1
U4_D23: U4.D23 | length 91.9
  Bottom Layer w6: 4198,3030 4198,3058 4212,3072 4212,3098 4223.7,3109.7 U4.D23
U4_H23: U4.H23 | length 237.5
  Bottom Layer w7.99: 4258,2928 4278,2928
  Bottom Layer w8: 4258,2894 4258,3093.7 cw(c4280.64,3093.72) U4.H23
U4_N24: C19.2 U4.N24 | length 126.9
  Bottom Layer w5: U4.N24@4313.8,3090 4314,3036 4340.4,3009.6 C19.2
USB_D+: U3.A6 U3.B6 U4.AD6 | length 1658.9
  Top Layer w5: v2(3324,3608) 3410,3608 3468,3550 3886,3550 3928,3592 4268,3592 4484,3376 v2(4484,3300)
  Bottom Layer w5: U3.A6 3206,3700 3216,3710 3236,3710 3245.4,3700.6 U3.B6 3245.4,3634.6 3272,3608 v2(3324,3608) ; U4.AD6 4470.9,3286.9 v2(4484,3300)
USB_D-: U3.A7 U3.B7 U4.AD4 | length 1596.9
  Top Layer w5: v2(3298,3586) 3410,3586 3460,3536 3892,3536 3936,3580 4260,3580 4458,3382 v2(4458,3308)
  Bottom Layer w5: U3.B7 3186.3,3633.7 3200,3620 3218,3620 3225.7,3627.7 3225.7,3628.8 ; U3.A7 3225.7,3626.3 3266,3586 v2(3298,3586) ; U4.AD4 4433.37,3308 v2(4458,3308)
VBAT: C7.2 Q9.3 R6.2 U1.2 U11.3 | length 2843.3
  Top Layer w8: v3(2088,3582) 2168,3582 2194,3608 v3(2194,3766)
  Top Layer w12: v1(2026,3596) 2026,3786 2084,3844 2182,3844 2222,3804 2224,3804 2312,3804 2354,3762 2550,3762 v1(2562,3750) ; v1(3340,3888) 3340,3816 3348,3808 3448,3808 v1(3500,3860)
  Bottom Layer w8: v3(2088,3582) U11.3 ; v3(2194,3766) 2228,3800 R6.2
  Bottom Layer w12: U1.2 1928.44,3453.8 C7.2 1928.44,3576.44 1946,3594 2066,3594 2088.6,3616.6 U11.3 ; v1(2562,3750) 3024,3750 3080,3806 3080,3860 3088,3868 3108,3888 v1(3340,3888) ; v1(3500,3860) 3732.6,3860 Q9.3
VDDH: C21.1 U4.Y2 | length 128.7
  Bottom Layer w5: U4.Y2 4382.74,3332.74 4414,3364 4444,3364 4456,3376 C21.1@4456,3407.05
VSYS: D10.1 Q9.2 SW9.2 | length 2010.6
  Top Layer w8: v1(3784,3850) 4060,3850 4072,3862 4130,3862 4280,3712 4324,3712 4538,3498 4538,2790 4524,2776 4500,2776 v1(4498,2778)
  Bottom Layer w8: Q9.2 3652,3914 3748,3914 3784,3878 v1(3784,3850)
  Bottom Layer w12: D10.1 3630.6,3914.2 Q9.2 ; SW9.2 4463.3,2778 v1(4498,2778)
VSYS_IN: C18.1 H1.4 LDO1.1 LDO1.3 SW9.3 U4.AD2 | length 3310.1
  Top Layer w8: v2(4436,3334) 4436,3270 4482,3224 4482,3176 4460,3154 v2(4460,3074)
  Top Layer w12: v1(4398,2550) 4398,2832 v1(4400,2832)
  Bottom Layer w5: SW9.3 4461.5,2859.5 4524,2922 4524,3036 4486,3074 v2(4460,3074)
  Bottom Layer w8: U4.AD2 4436,3330.32 v2(4436,3334)
  Bottom Layer w12: H1.4 2688,2207 2688,2378 2786,2476 3682,2476 3748,2542 3938,2542 4004,2476 4004,2370 4061.4,2312.6 LDO1.3 4088,2346 4100,2358 4152,2358 4162.3,2347.7 LDO1.1 4260.1,2312.6 C18.1 4314.4,2322.4 4346,2354 4346,2498 v1(4398,2550) ; v1(4400,2832) 4426.7,2858.7 SW9.3
XC1: C6.2 U4.B24 X1.1 | length 337.6
  Bottom Layer w6: C6.2 4068.4,2918.6 X1.1 4072.5,2932.5 4106,2966 4162,2966 4176,2980 4176,3070.32 U4.B24
XC2: C5.1 U4.A23 X1.3 | length 146.7
  Bottom Layer w6: X1.3 4139.5,3020.5 4123.6,3036.4 4123.6,3088 4154.3,3088 U4.A23@4176.1,3109.7
XL1: C4.1 U4.D2 X3.2 | length 363.3
  Bottom Layer w5: C4.1 4255.14,3605.55 X3.2 4280.8,3543.2 4292,3532 4292,3424 4232,3364 4232,3333 U4.D2
XL2: C3.1 U4.F2 X3.1 | length 389.3
  Bottom Layer w5: U4.F2 4242,3329.2 4242,3358 4302,3418 4302,3526 4363.6,3587.6 C3.1
pads on no net: LDO1.4 SW1.2 SW1.3 SW2.2 SW2.3 SW3.2 SW3.3 SW4. SW4.3 SW4.4 SW5. SW5.3 SW5.4 SW6. SW6.3 SW6.4 SW9. SW9.1 SW9.4 SW10.2 SW10.3 U3. U3.A8 U3.B8 U4.A14 U4.AC9 U4.AC11 U4.AC15 U4.AC17 U4.AC19 U4.AC21 U4.B15 U4.B17 U4.H2 U4.P2 U4.P23 U4.T23 U4.V23 U4.Y23

## Polygon pours and split planes (outlines as drawn)
EXTERN_5V on Bottom Layer (solid): 3108,3642 3324,3642 3322,3644 3322,3874 3320,3872 3110,3872
GND on Bottom Layer (solid): 1530,4330 1500,4300 1500,1666 1664,1830 5004,1830 5034,1860 5034,4200
GND on Top Layer (solid): 1614,4270 1670,4214 1670,1500 1936,1766 4980,1766 4994,1780 4994,4220

## Keep-outs
Keep-Out Layer:
  lines w10: 1858,2417.99 ccw(c1968.24,2417.99) 1939.12,2311.67 ; 1858,3906.72 cw(c1903.28,3906.72) 1903.28,3952 ; 2478.83,2163.85 ccw(c2784.2,3278.79) 2784.2,2122.78 ; 3647.43,2122.78 ccw(c3647.43,3278.79) 3952.8,2163.85 ; 4492.51,2311.67 ccw(c4463.39,2417.99) 4573.63,2417.99 ; 4528.35,3952 cw(c4528.35,3906.72) 4573.63,3906.72

## Other copper
Top Layer:
  pour cut-out: 4214,3038 4294.16,3038 4294.16,2756.16 4294,2756 4234,2756 4214,2756
Bottom Layer:
  pour cut-out: 4214,3038 4294.16,3038 4294.16,2756.16 4294,2756 4234,2756 4214,2756

## Silkscreen, mask and mechanical layers (free items; w line width, h text height)
Top Overlay:
  lines w10: 1945.41,3245.5 1973.27,3245.5 cw(c1973.27,3215.13) 1973.27,3184.76 1945.41,3184.75 1945.41,2614.22 2010.56,2614.22 cw(c2010.56,2594.51) 2030.27,2594.51 2030.27,2539.37 2157.68,2539.37 ; 1945.41,3504.48 4486.27,3504.48 4486.27,2956.86 4461.24,2956.86 ccw(c4461.06,2926.49) 4461.23,2896.12 4485.05,2896.12 4485.05,2597.7 cw(c4366.94,2597.7) 4443.92,2508.13 4305.66,2389.31 cw(c4228.68,2478.89) 4228.68,2360.78 2268.93,2360.78 ; 3059.12,3636.73 3051.33,3712.93 ; 3308.72,3886.34 cw(c3301.48,3815.29) 3372.51,3822.56 3380.3,3746.36 3380.29,3712.93 3372.51,3636.73 cw(c3301.47,3643.98) 3308.73,3572.94 ; 3051.33,3712.93 3059.12,3636.72 ; 3051.33,3712.93 3051.35,3746.36 ; 3051.33,3712.93 3051.35,3746.36 ; 3051.35,3746.36 3059.13,3822.55 3051.35,3746.36 ; 3059.12,3636.72 ccw(c3130.16,3643.99) 3122.91,3572.95 ; 3059.12,3636.72 ccw(c3130.16,3643.99) 3122.91,3572.95 ; 3122.91,3572.95 3199.1,3565.17 ; 3122.91,3572.95 3199.1,3565.17 ; 3122.91,3886.34 3199.1,3894.13 ; 3122.91,3886.34 3199.1,3894.13 ; 3122.9,3886.34 ccw(c3130.16,3815.3) 3059.12,3822.55 cw(c3130.16,3815.3) 3122.9,3886.34 ; 3199.1,3565.17 3232.54,3565.15 ; 3199.1,3565.17 3232.54,3565.15 ; 3199.1,3894.13 3232.54,3894.11 ; 3199.1,3894.13 3232.54,3894.11 ; 3232.54,3565.15 3308.73,3572.94 ; 3232.54,3565.15 3308.73,3572.94 ; 3232.54,3894.11 3308.73,3886.34 3232.54,3894.11
  lines w10 net S$48758: 2157.67,2472.04 ccw(c2268.93,2472.04) 2268.93,2360.78 ; 2157.68,2472.04 2157.68,2539.37
  lines w10 net S$52734: 1945.4,3245.5 1945.41,3504.48
Bottom Overlay:
  circle w10: c1942.65,3867.35 r78.74
  circle w10: c1968.24,2417.99 r78.74
  circle w10: c4463.39,2417.98 r78.74
  circle w10: c4488.98,3867.35 r78.74
  circle w10: c1942.65,3670.5 r78.74
  circle w10: c4488.98,3698.06 r78.74
  lines w10 net S$8205: 2062,2300.89 2062,3481.99
  lines w10 net S$8209: 2062,2300.89 4030.5,2300.89
  lines w10 net S$8213: 2062,3481.99 4030.5,3481.99
  lines w10 net S$8217: 4030.5,2300.89 4030.5,3481.99
  text "503048 Battery" at 3962,3452 h118.11 r92
  text "GND" at 3123.41,2263.62 h59.05
  text "SWD" at 2819.05,2259.73 h59.05
  text "SWC" at 2984.23,2260.06 h59.05
  text "3V3" at 2629.82,2182.04 h80
Document:
  lines w10: 2092.55,3729.64 4378.45,3729.64 ; 3215.82,1968.3 3215.83,4009.09 ; 4313.49,3546.57 3534.12,3546.57 cw(c3534.12,3611.53) 3469.16,3611.53 3469.16,3847.75 cw(c3534.12,3847.75) 3534.12,3912.71 4313.49,3912.71 cw(c4313.49,3847.75) 4378.45,3847.75 ; 4378.5,3611.5 4378.5,3708.2 4378.5,3847.8 ; 2053.18,3611.53 2053.18,3847.75 cw(c2118.14,3847.75) 2118.14,3912.71 2897.51,3912.71 cw(c2897.51,3847.75) 2962.47,3847.75 2962.47,3611.53 cw(c2897.51,3611.53) 2897.51,3546.57 2118.14,3546.57 cw(c2118.14,3611.53) 2053.18,3611.53 ; 2092.55,3611.53 2092.55,3847.75 cw(c2118.14,3847.75) 2118.14,3873.34 2419.71,3873.34 cw(c2419.72,3847.75) 2445.31,3847.75 2445.3,3611.53 cw(c2419.72,3611.53) 2419.72,3585.94 2118.14,3585.94 cw(c2118.14,3611.53) 2092.55,3611.53 ; 2570.34,3611.53 2570.34,3847.75 cw(c2595.94,3847.75) 2595.94,3873.34 2897.51,3873.34 cw(c2897.51,3847.75) 2923.1,3847.75 2923.1,3611.53 cw(c2897.51,3611.53) 2897.51,3585.94 2595.93,3585.94 cw(c2595.94,3611.53) 2570.35,3611.53 ; 3508.53,3611.53 3508.53,3847.75 cw(c3534.12,3847.75) 3534.12,3873.34 3835.7,3873.34 cw(c3835.69,3847.75) 3861.28,3847.75 3861.29,3611.53 cw(c3835.69,3611.53) 3835.69,3585.94 3534.12,3585.94 cw(c3534.12,3611.53) 3508.53,3611.53 ; 3986.32,3611.53 3986.32,3847.75 cw(c4011.91,3847.75) 4011.91,3873.34 4313.49,3873.34 cw(c4313.49,3847.75) 4339.08,3847.75 4339.08,3611.53 cw(c4313.49,3611.53) 4313.49,3585.94 4011.92,3585.94 cw(c4011.91,3611.53) 3986.32,3611.53